# EAGLE board luciole_embarque (EAGLE 7.6.0)
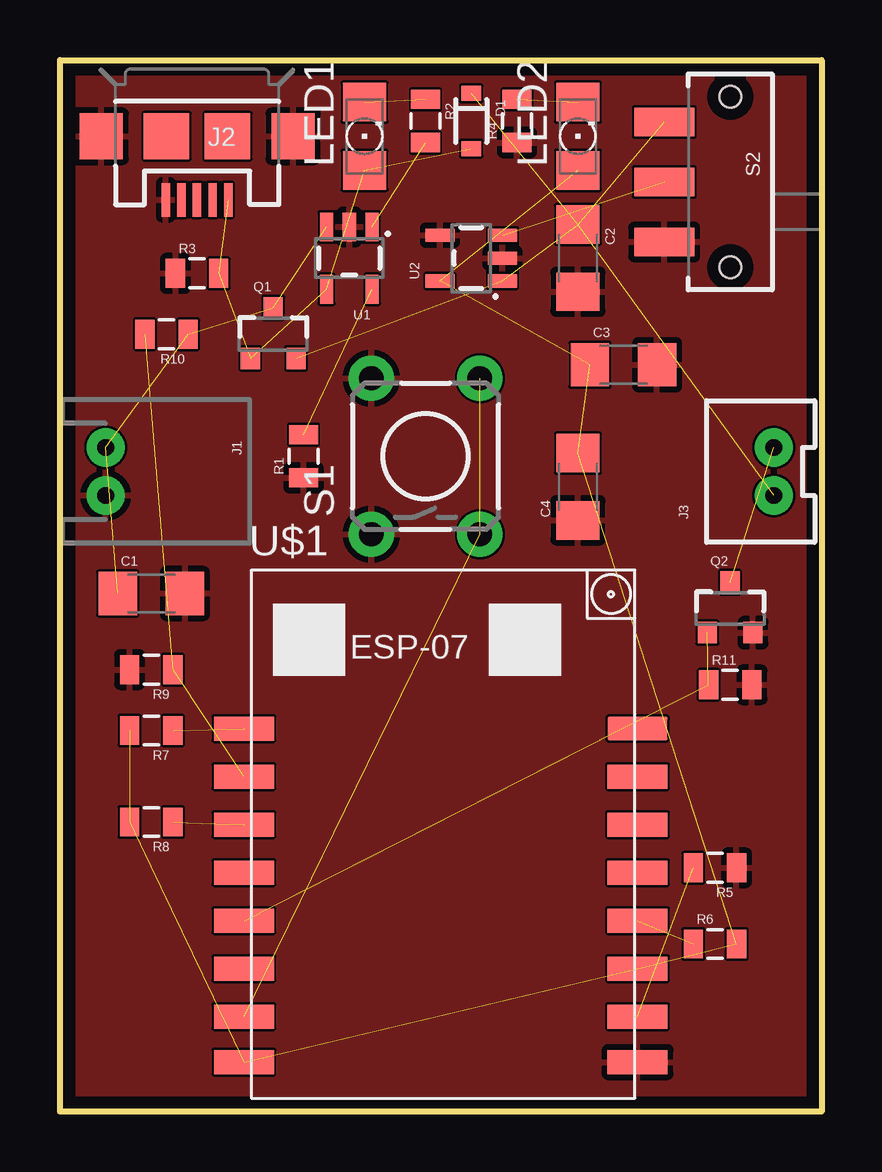
[diagram p0: board, top side]
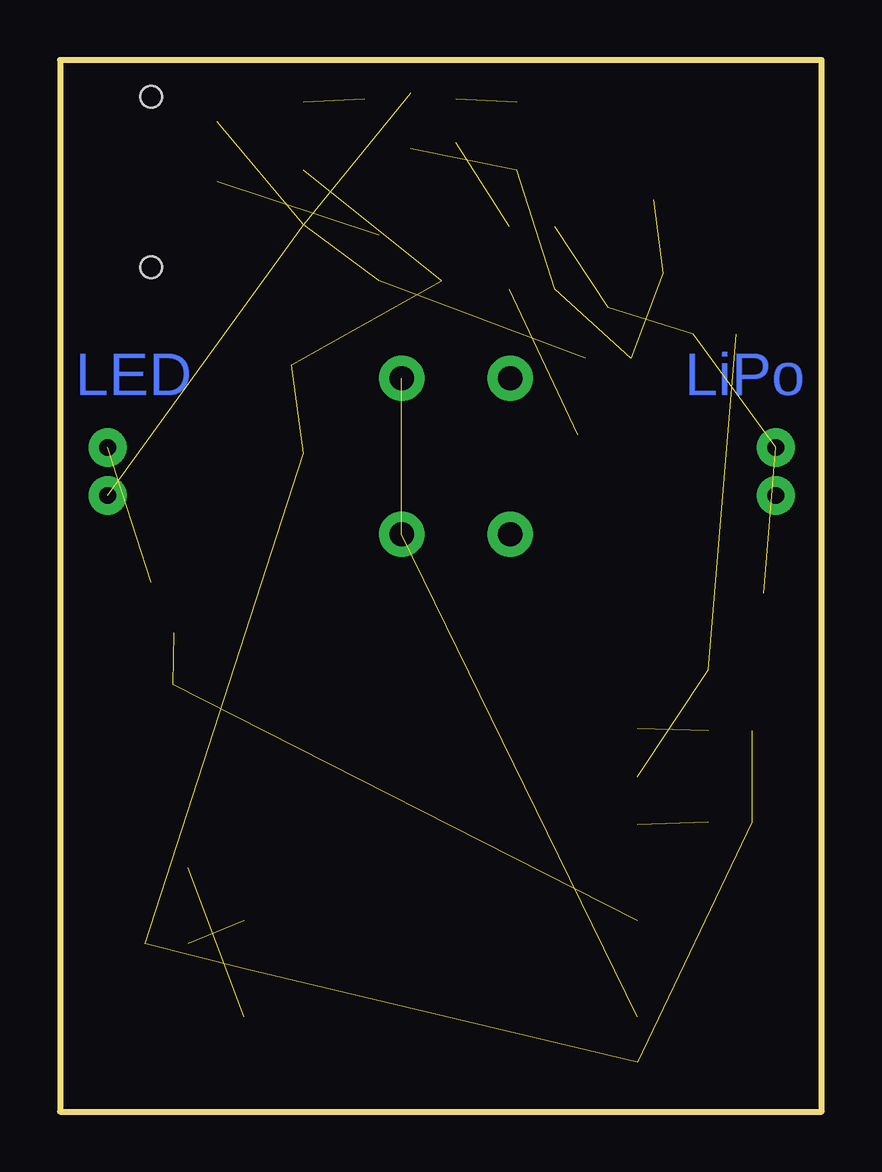
[diagram p1: board, bottom side, seen from below]

Size 31.75 x 43.81 mm. Coordinates in mm from the lower left corner, seen from the top.
Outline: 0,43.81 31.75,43.81 31.75,0 0,0 0,43.81
Copper layers (1*16): Top 0.035mm / dielectric 1.5mm / Bottom 0.035mm
Design rules "DRC": minimum track width 10mil, minimum drill 20mil, track to track 4mil, track to pad 4mil, pad to pad 2mil, via to via 2mil, smd to smd 2mil, copper to edge 20mil, drill to drill 8mil, minimum pad ring 10mil, minimum via ring 8mil, stop-mask expansion 4mil, vias tented up to drill 0mil, thermal gap 10mil

## Footprints (pad centres in the part's own frame; a part is rotated, then mirrored left to right if it is on the bottom)
1206 = smd 1.6 x 1.8: 1 -1.4,0; 2 1.4,0
SOD-323 = smd 0.63 x 0.83: A 1.15,0; C -1.15,0
JST-2-PTH-NS = drill 0.7 pad 1.6: 1 -1,0; 2 1,0
USB-MICROB = smd 0.35 x 1.4: D+ 0,2.65; D- -0.65,2.65; GND 1.3,2.65; ID 0.65,2.65; VBUS -1.3,2.65 | smd 1.8 x 1.9: MT1 -4,0; MT2 4,0 | smd 1.9 x 1.9: P$1 -1.27,0; P$2 1.27,0
JST-2-PTH-VERT = drill 0.7 pad 1.6: 1 -1,-0.55; 2 1,-0.55
LED_1206 = smd 1.6 x 1.803: A -1.422,0; C 1.422,0
SOT23-3 = smd 0.8 x 0.9: 1 -0.95,-1; 2 0.95,-1; 3 0,1.1
0805 = smd 0.8 x 1.2: 1 -0.9,0; 2 0.9,0
TACTILE-PTH = drill 1.016 pad 1.88: 1 -3.251,2.261; 2 3.251,2.261; 3 -3.251,-2.261; 4 3.251,-2.261
SWITCH-SPDT-SMD = smd 1.2 x 2.5: 1 -2.5,-2.75; 2 0,-2.75; 3 2.5,-2.75 | hole 0.9: -3.55,0; 3.55,0
SOT23-5 = smd 0.55 x 1.2: 1 -0.95,-1.3; 2 0,-1.3; 3 0.95,-1.3; 4 0.95,1.3; 5 -0.95,1.3
ESP07-16PIN = smd 2.5 x 1: ADC -8.2,3.8; CH_PD -8.2,1.8; GND 8.2,-8.105; GPIO0 8.2,-2.2; GPIO2 8.2,-4.2; GPIO4 8.2,1.8; GPIO5 8.2,-0.2; GPIO12 -8.2,-4.2; GPIO13 -8.2,-6.2; GPIO14 -8.2,-2.2; GPIO15 8.2,-6.2; GPIO16 -8.2,-0.2; REST -8.2,5.8; RX 8.2,3.8; TX 8.2,5.8; VCC -8.2,-8.105

## Placement (x,y rotation side)
C1  4.7 uF  [1206]  3.81,21.59 0 top
C2  1 uF  [1206]  21.59,35.56 270 top
C3  2.2 uF  [1206]  23.49,31.11 0 top
C4  100 nF  [1206]  21.59,26.04 90 top
D1  BAT20J  [SOD-323]  17.15,41.27 270 top
J1  LiPo  [JST-2-PTH-NS]  1.91,26.67 270 top
J2  USB-MICROB  [USB-MICROB]  5.72,40.64 180 top
J3  LED  [JST-2-PTH-VERT]  29.21,26.67 90 top
LED1  JAUNE  [LED_1206]  12.7,40.64 90 top
LED2  ROUGE  [LED_1206]  21.59,40.64 90 top
Q1  2.5A/30V  [SOT23-3]  8.89,32.39 0 top
Q2  MOSFET-NCHANNELAO3404A  [SOT23-3]  27.94,20.96 0 top
R1  2K  [0805]  10.16,27.3 90 top
R2  ?  [0805]  15.24,41.27 270 top
R3  10K  [0805]  5.72,34.92 0 top
R4  200  [0805]  19.05,41.27 90 top
R5  10K  [0805]  27.3,10.16 180 top
R6  10K  [0805]  27.3,6.98 0 top
R7  10K  [0805]  3.81,15.87 180 top
R8  10K  [0805]  3.81,12.06 180 top
R9  10K  [0805]  3.81,18.41 180 top
R10  10K  [0805]  4.45,32.39 180 top
R11  10K  [0805]  27.94,17.78 0 top
S1  PUSH  [TACTILE-PTH]  15.24,27.3 90 top
S2  ON / OFF  [SWITCH-SPDT-SMD]  27.94,38.73 270 top
U1  MCP73831  [SOT23-5]  12.06,35.56 180 top
U2  3.3V  [SOT23-5]  17.15,35.56 90 top
U$1  ESP07-16PIN  [ESP07-16PIN]  15.88,10.16 0 top

## Library data of the parts
C1-C4 = SparkFun-Capacitors
D1 = SparkFun-DiscreteSemi; PROD_ID: DIO-11623
J1 J3 = SparkFun-Connectors
J2 = SparkFun-Connectors; PROD_ID: CONN-09505
LED1 LED2 = eagle-ltspice; SPICEMODEL: NONE; SPICEPREFIX: D; SPICETYPE: diode
Q1 = SparkFun-DiscreteSemi; PROD_ID: TRANS-11308
Q2 = SparkFun-DiscreteSemi; PROD_ID: TRAN-12988
R1-R11 = SparkFun-Passives
S1 = SparkFun-Retired
S2 = SparkFun-Electromechanical
U1 = SparkFun-PowerIC; PROD_ID: IC-09995
U2 = SparkFun-PowerIC; PROD_ID: VREG-12457
U$1 = esp8266modules; DIMENSIONS: 22.0 x 16.0 mm; PINS: 16; PITCH: 0.078" / 2 mm

## Nets
GND: C1.2 C2.2 C3.2 C4.1 J1.2 J2.GND J2.MT1 J2.MT2 Q2.2 R1.1 R3.1 R4.1 R5.1 R9.2 R11.2 S1.1 S1.2 S2.3 U1.2 U2.2 U2.4 U$1.GND
N$1: R5.2 U$1.GPIO15
N$2: R1.2 U1.5
N$3: S2.2 U2.3
N$4: R2.2 U1.1
N$5: LED1.C R2.1
N$6: R6.1 U$1.GPIO0
N$8: LED2.C R4.2
N$9: R7.1 U$1.REST
N$10: R8.1 U$1.CH_PD
N$11: R9.1 R10.2 U$1.ADC
N$12: S1.3 S1.4 U$1.GPIO13
N$13: Q2.1 R11.1 U$1.GPIO14
N$14: J3.2 Q2.3
V_BATT: C1.1 J1.1 Q1.3 R10.1 U1.3
VCC: C3.1 C4.2 LED2.A R6.2 R7.2 R8.2 U2.5 U$1.GPIO2 U$1.VCC
VIN: C2.1 D1.C J3.1 Q1.2 S2.1 U2.1
VUSB: D1.A J2.VBUS LED1.A Q1.1 R3.2 U1.4

## Tracks (layer width: path | path; a pad name or v marks a point on that pad's centre or on a via)
GND
  pour Top: 0,43.81 31.75,43.81 31.75,0 0,0
N$1  (1 unrouted)
N$2  (1 unrouted)
N$3  (1 unrouted)
N$4  (1 unrouted)
N$5  (1 unrouted)
N$6  (1 unrouted)
N$8  (1 unrouted)
N$9  (1 unrouted)
N$10  (1 unrouted)
N$11  (2 unrouted)
N$12  (2 unrouted)
N$13  (2 unrouted)
N$14  (1 unrouted)
V_BATT  (4 unrouted)
VCC  (8 unrouted)
VIN  (5 unrouted)
VUSB  (5 unrouted)

## Text on the board
Bottom: LiPo | LED